# Altium PCB PCB2.PcbDoc
Units mm, origin at the board's own origin, x right, y up, seen from the top; angles counter-clockwise.
Board outline 43.94 x 25.27 mm, 2 copper layers (Top Layer, Bottom Layer), stack 1.569 mm thick; 4 components, 10 nets, 46 pads, 0 vias.
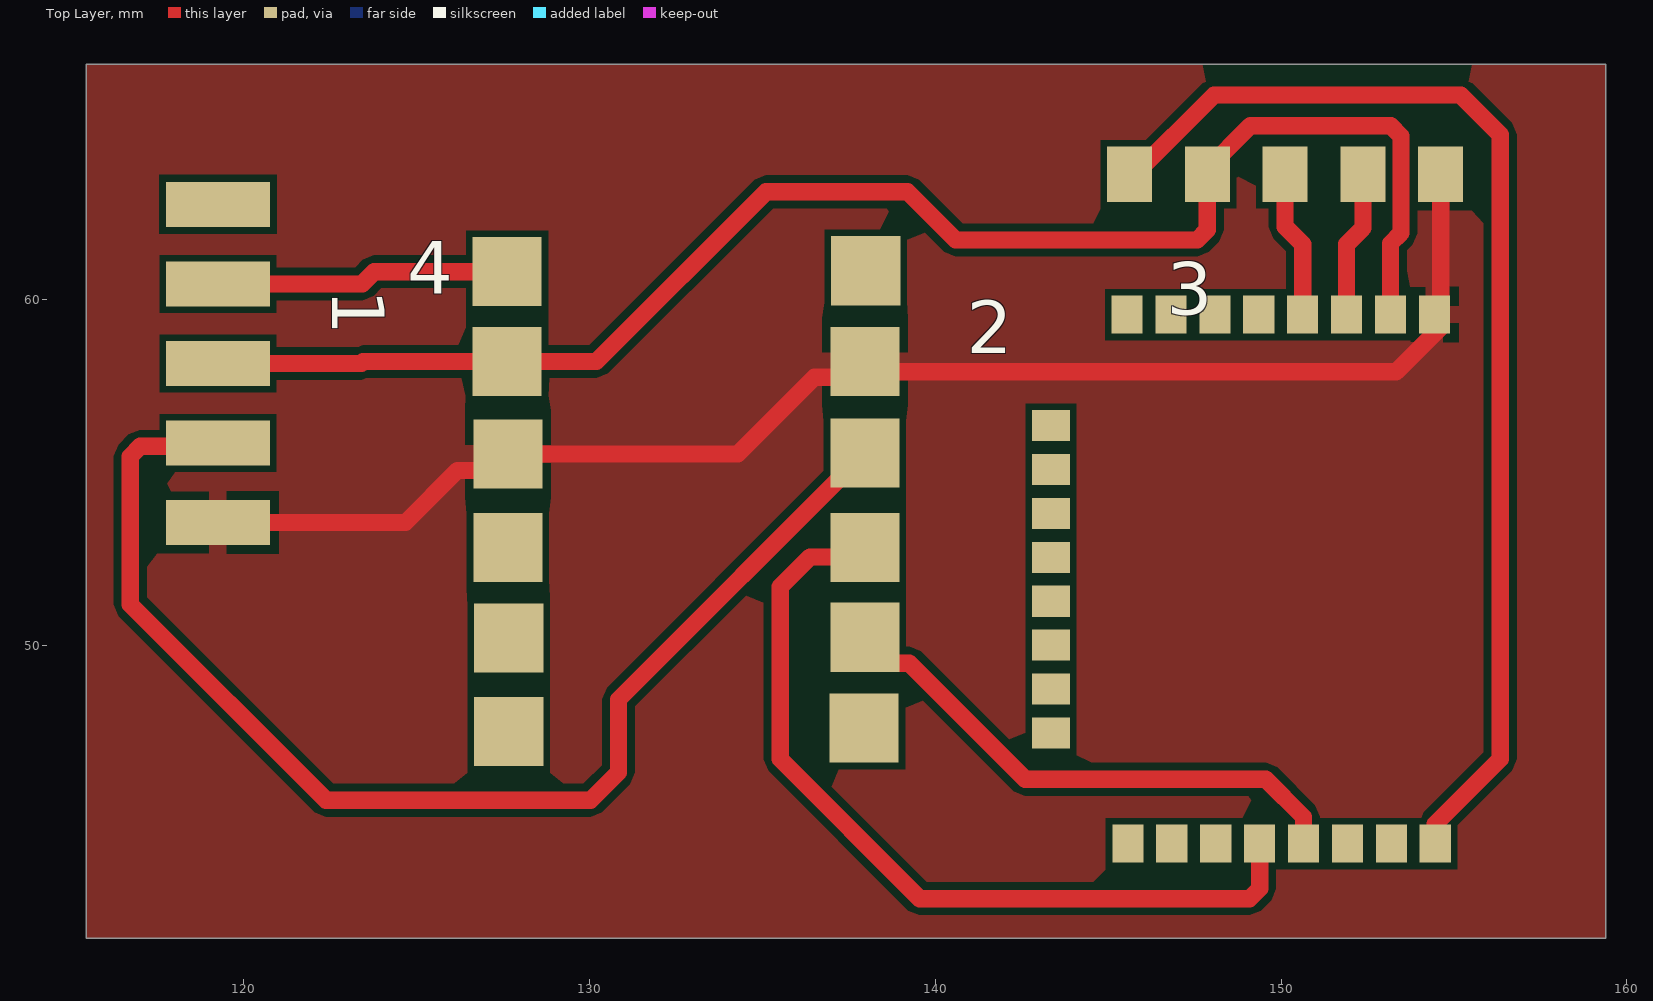
[diagram p0: Top Layer view]
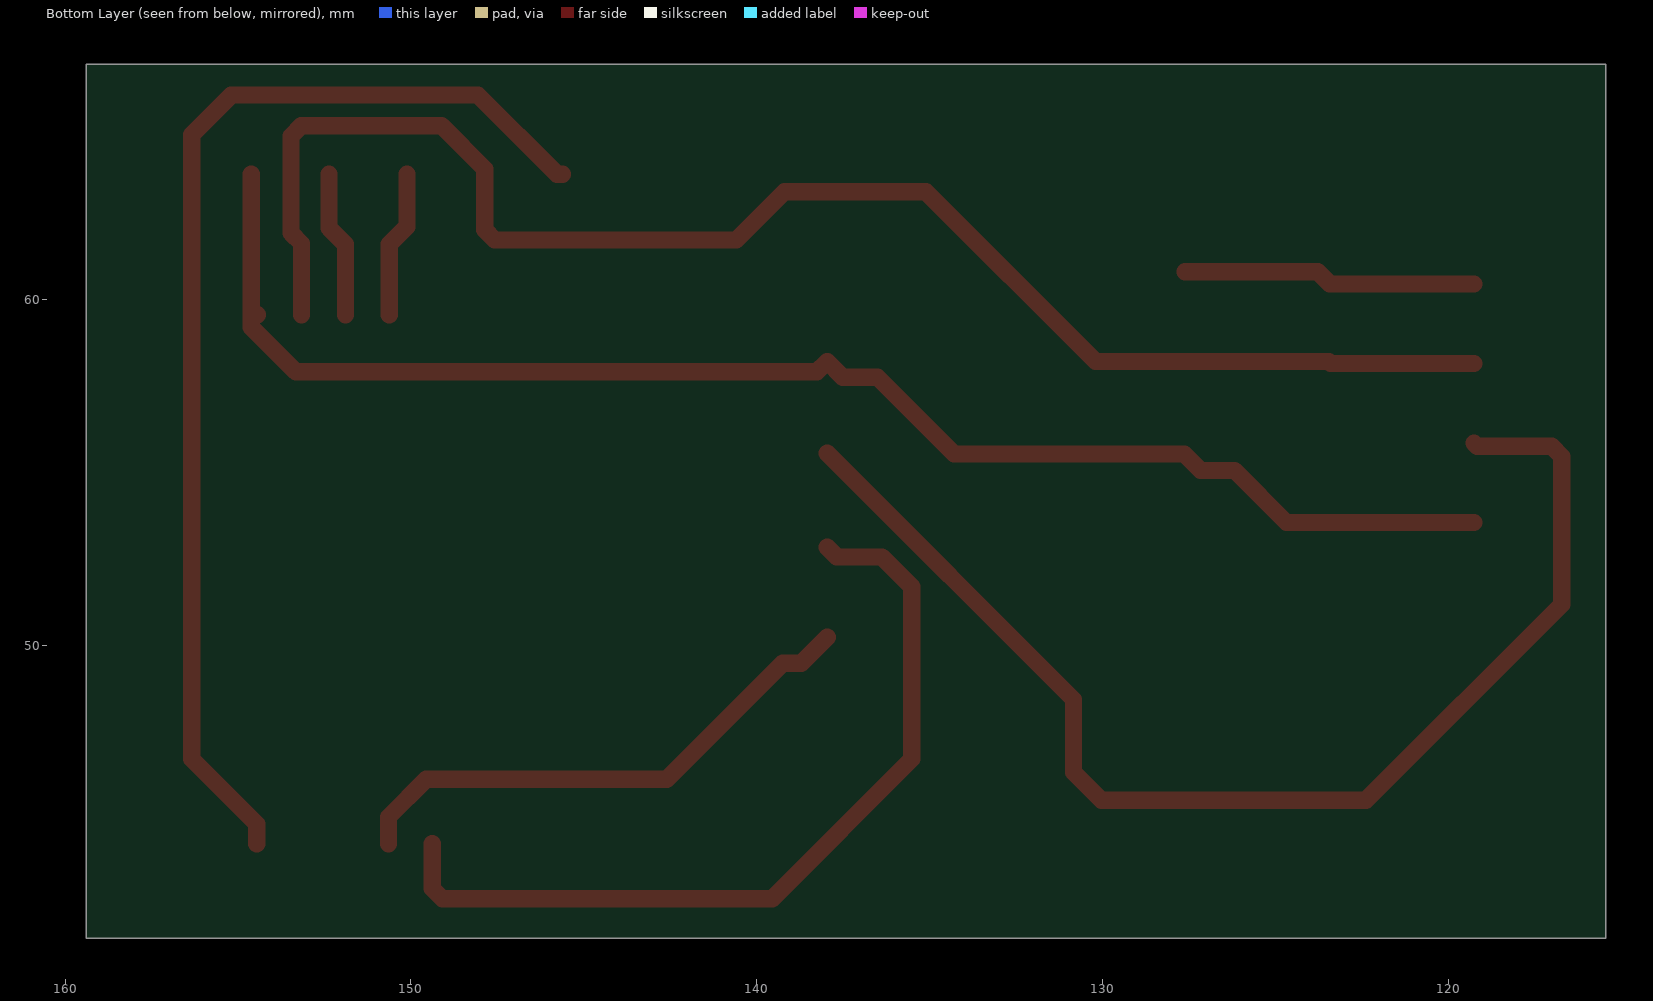
[diagram p1: Bottom Layer view, seen from below]

## Layer stack, top to bottom
Top Solder: solder mask 0.0254, SM-001, Dk 4
Top Layer: signal copper 0.035
Dielectric 1: core 1.4986, Core-043, Dk 4.3
Bottom Layer: signal copper 0.035
Bottom Solder: solder mask 0.0254, SM-001, Dk 4

## Board outline
115.443,41.529 115.443,66.802 159.385,66.802 159.385,41.529

## Design rules (kind name [scope] priority, off if disabled: settings)
Clearance [All] p1: gap=0.2 ignorepadtopadclearanceinfootprint=FALSE
MinimumSolderMaskSliver [All] p1: minsoldermaskwidth=0.1
PolygonConnect [All] p1: connectstyle=Relief reliefconductorwidth=0.5 reliefentries=4 polygonreliefangle="90 Angle" airgapwidth=0.254
RoutingLayers [All] p1: top layer_v5=TRUE bottom layer_v5=FALSE
RoutingVias [All] p1: holewidth=0.711 width=1.27 viastyle="Through Hole" minholewidth=0.711 minwidth=1.27 maxholewidth=0.711 maxwidth=1.27
SilkToSolderMaskClearance [IsPad] p1: minsilkscreentomaskgap=0.1 clearancetoexposedcopper=TRUE
SolderMaskExpansion [All] p1: expansion=0.102 istentingtop=FALSE
Width [All] p1: maxlimit=1 minlimit=0.2 preferedwidth=0.5
27 further rules are at their usual default settings.

## Components (designator, comment, footprint, x,y, rotation, side; value= is the part's Value field where it differs from the comment)
1 "Arduino connecter" Arduino 119.228,53.552 r0 top
2 "CC2530" CC2530 154.432,44.513 r90 top
3 "DEBUG" DEBUG 145.614,63.627 r270 top
4 "LLV" LLV 126.26,46.282 r0 top

## Footprints (in the part's own frame and the unit in brackets; to place one, negate y for a bottom-side part, rotate by r counter-clockwise, add the part's x,y. Pads: shape width x height; smd on the part's side, far side on the other; paste and mask are expansions set on the pad)
Arduino [mm]
  rect 3x1.3 smd: 49(0.025,9.2) 50(0.025,6.9) 51(0.025,4.6) 52(0.025,2.3) 53(0.025,0)
CC2530 [mm]
  rect 1.1x0.9 smd: 5(15.05,0) 6(15.05,1.27) 7(15.05,2.54) 8(15.05,3.81) 9(15.05,5.08) 10(15.05,6.35) 11(15.05,7.62) 12(15.05,8.89) 21(-0.25,8.865) 22(-0.25,7.595) 23(-0.25,6.325) 24(-0.25,5.055) 25(-0.25,3.785) 26(-0.25,2.515) 27(-0.25,1.245) 28(-0.25,-0.025)
  rect 0.9x1.1 smd: 13(11.84,11.09) 14(10.57,11.09) 15(9.3,11.09) 16(8.03,11.09) 17(6.76,11.09) 18(5.49,11.09) 19(4.22,11.09) 20(2.95,11.09)
DEBUG [mm]
  rect 1.6x1.3 smd: 29(0,9) 30(0,6.75) 31(0,4.5) 32(0,0) 33(0,2.25)
LLV [mm]
  rect 2x2 smd: 54(1.35,14.525) 55(1.35,11.925) 56(1.375,9.25) 57(1.375,6.55) 58(1.4,3.925) 59(1.4,1.225) 60(11.725,14.55) 61(11.7,11.925) 62(11.7,9.275) 63(11.7,6.55) 64(11.7,3.95) 65(11.675,1.325)

## Nets (pads, with @x,y where several pads share a name; then routed paths per layer and width w, separated by ;. In a path a pad name is that pad's centre, name@x,y a point inside that pad or via, vN(x,y) a via of type N, cw(c..) or ccw(c..) an arc to the next point about the centre after c; other vN are vias at no path point)
GND: 1.53 2.5 3.29 4.56 4.61 | length 42.6
  Top Layer w0.5: 1.53 124.672,53.552 126.178,55.058 127.161,55.058 4.56 134.281,55.532 136.503,57.754 137.507,57.754 4.61 138.255,57.912 153.324,57.912 154.614,59.202 2.5@154.614,59.563 ; 2.5 2.5@154.614,59.563 ; 3.29 2.5@154.614,59.563
Net1_49: 1.49
Net1_50: 1.50 4.54 | length 8.5
  Top Layer w0.5: 1.50 123.419,60.452 123.774,60.807 4.54
Net1_51: 1.51 2.6 3.33 4.55 | length 44.7
  Top Layer w0.5: 1.51 123.393,58.152 123.448,58.207 4.55 130.191,58.207 135.103,63.119 139.192,63.119 140.589,61.722 147.571,61.722 147.864,62.015 147.864,63.777 149.111,65.024 153.171,65.024 153.464,64.731 153.464,61.922 153.162,61.62 2.6
Net1_52: 1.52 4.62 | length 36
  Top Layer w0.5: 1.52 119.154,55.753 117.006,55.753 116.713,55.46 116.713,51.181 122.377,45.517 130.023,45.517 130.835,46.33 130.835,48.432 4.62
Net2_7: 2.7 3.30 | length 4.3
  Top Layer w0.5: 2.7 151.892,61.595 152.364,62.067 3.30
Net2_8: 2.8 3.31 | length 4.3
  Top Layer w0.5: 3.31 150.114,62.103 150.622,61.595 2.8
Net2_24: 2.24 4.63 | length 24.9
  Top Layer w0.5: 4.63 137.684,52.556 136.376,52.556 135.509,51.689 135.509,46.711 139.548,42.672 149.084,42.672 149.377,42.965 2.24
Net2_25: 2.25 4.64 | length 15.6
  Top Layer w0.5: 4.64 138.71,49.482 139.24,49.482 142.596,46.126 149.555,46.126 150.647,45.035 2.25
Net2_28: 2.28 3.32 | length 33.4
  Top Layer w0.5: 3.32 145.771,63.627 148.057,65.913 155.194,65.913 156.337,64.77 156.337,46.711 154.457,44.831 2.28
pads on no net: 2.9 2.10 2.11 2.12 2.13 2.14 2.15 2.16 2.17 2.18 2.19 2.20 2.21 2.22 2.23 2.26 2.27 4.57 4.58 4.59 4.60 4.65

## Polygon pours and split planes (outlines as drawn)
GND on Top Layer "GND_L01_P000" (solid, pour order 0): 159.385,66.802 115.443,66.802 115.443,41.529 159.385,41.529

## Silkscreen, mask and mechanical layers (free items; w line width, h text height)
Mechanical 1:
  the board outline again, w0.254